# Altium PCB poe.PcbDoc
Units mm, origin at the board's own origin, x right, y up, seen from the top; angles counter-clockwise.
Board outline 35.6 x 44.4 mm, 2 copper layers (Top, Bottom), stack 1.58 mm thick; 47 components, 38 nets, 142 pads, 50 vias.
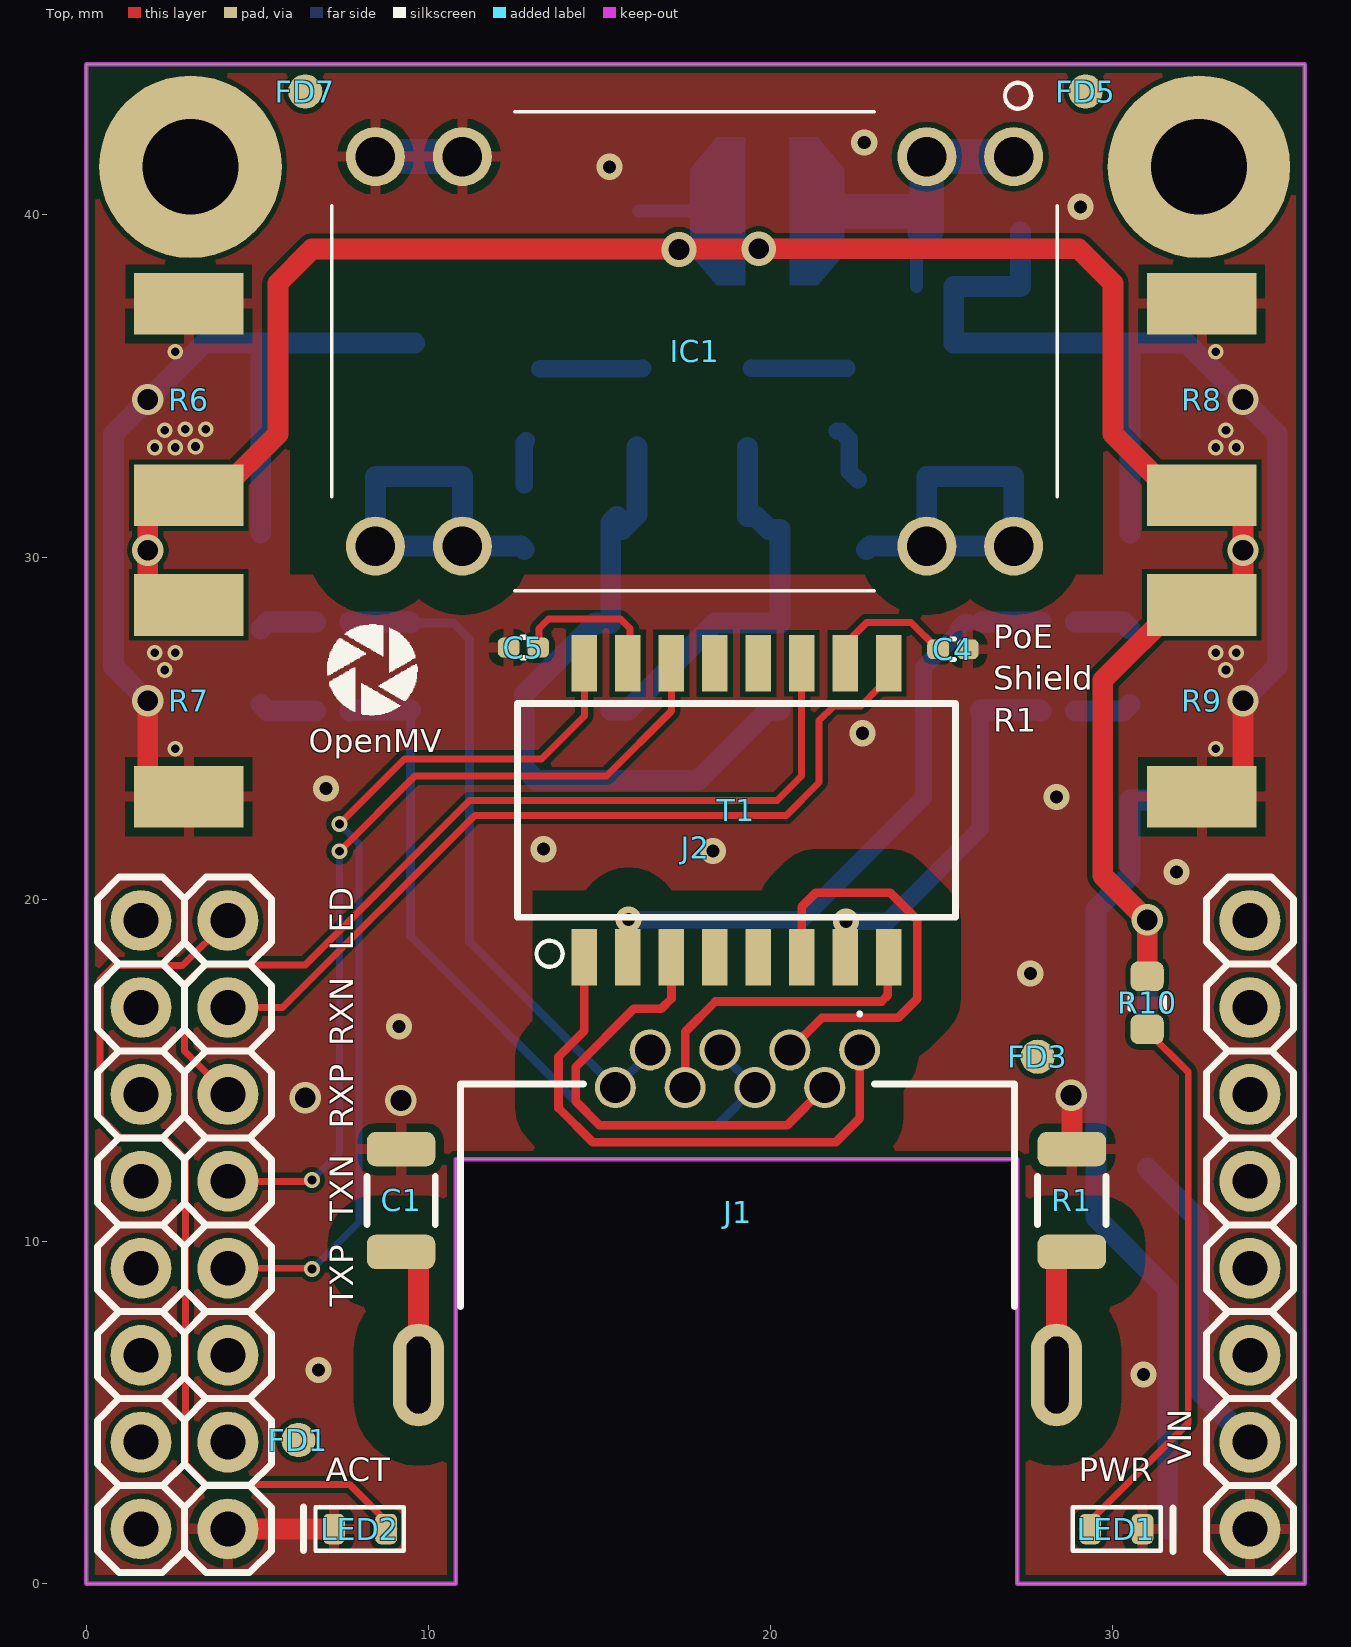
[diagram p0: Top view]
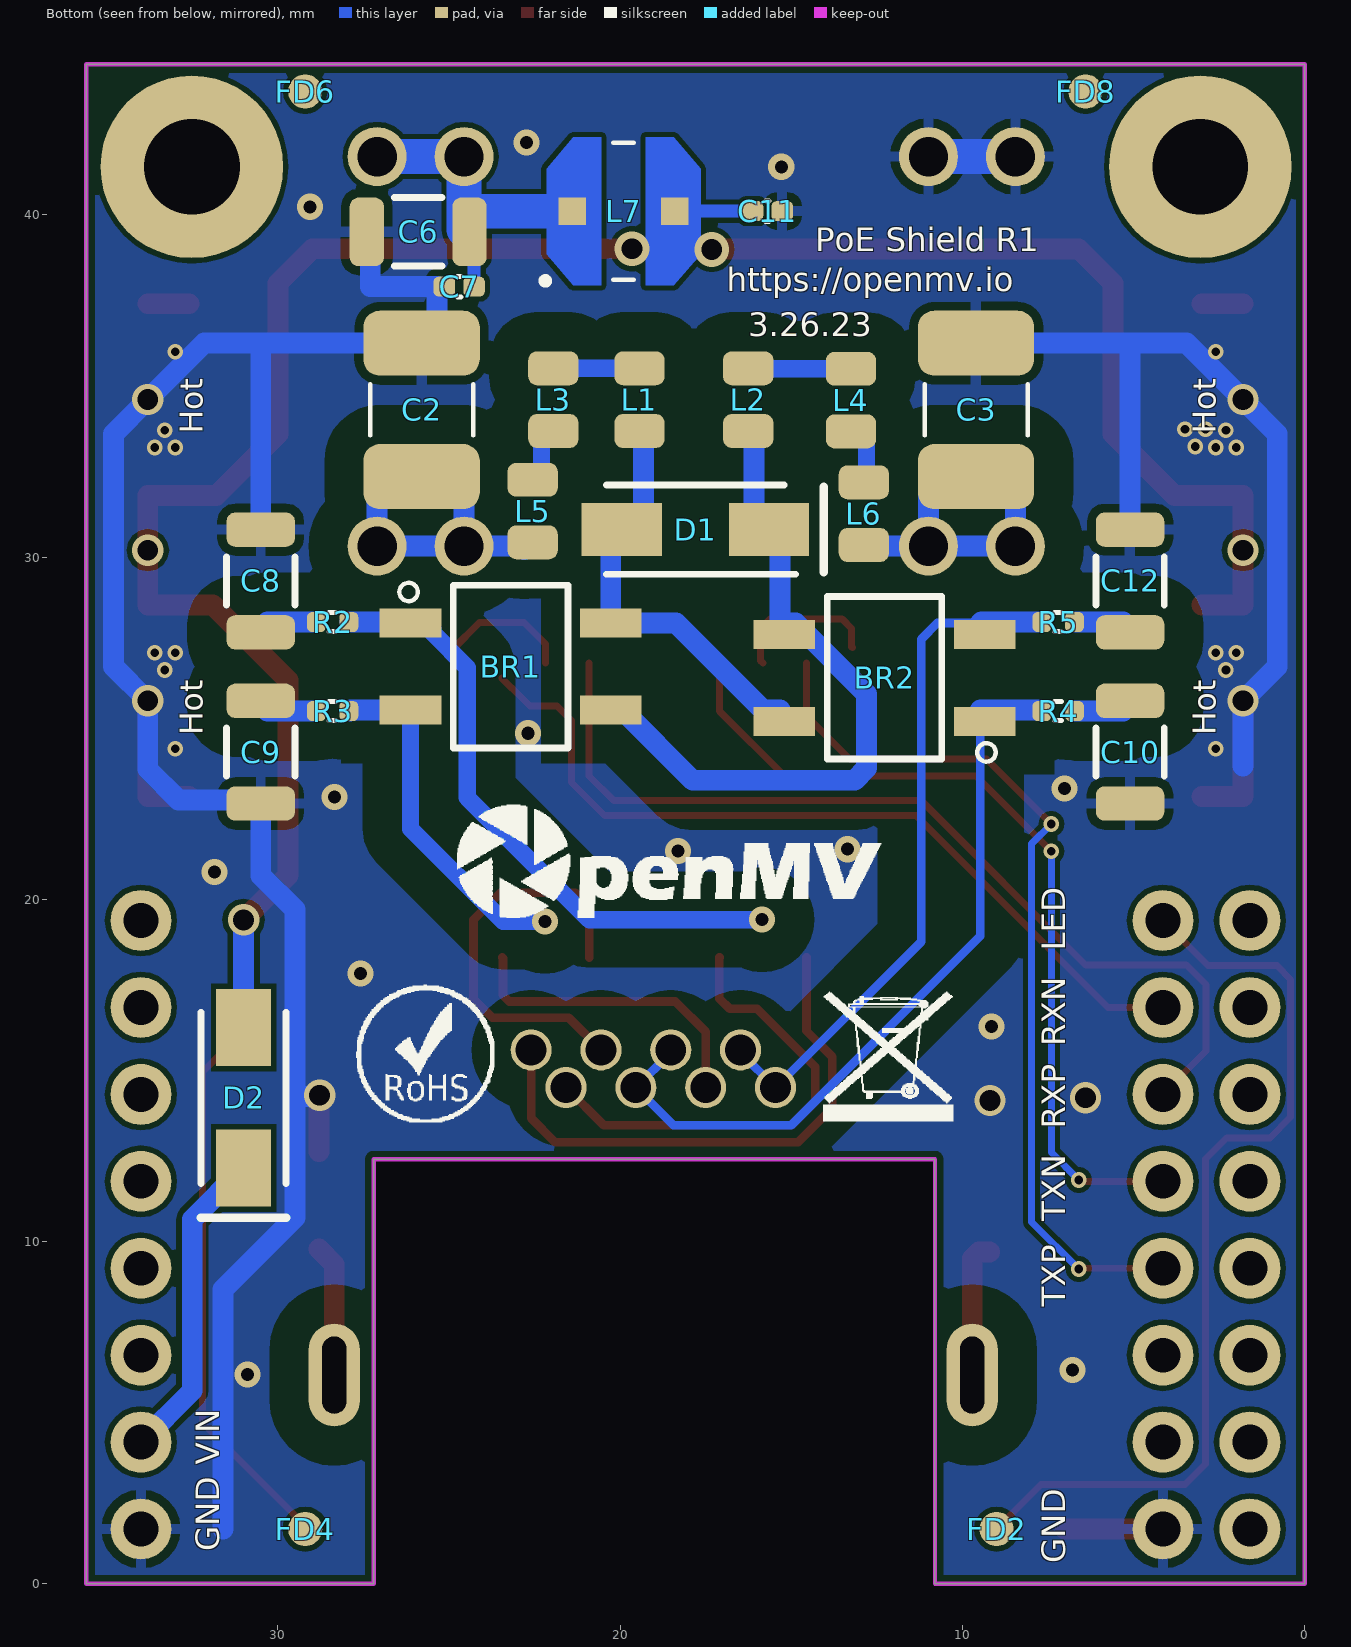
[diagram p1: Bottom view, seen from below]
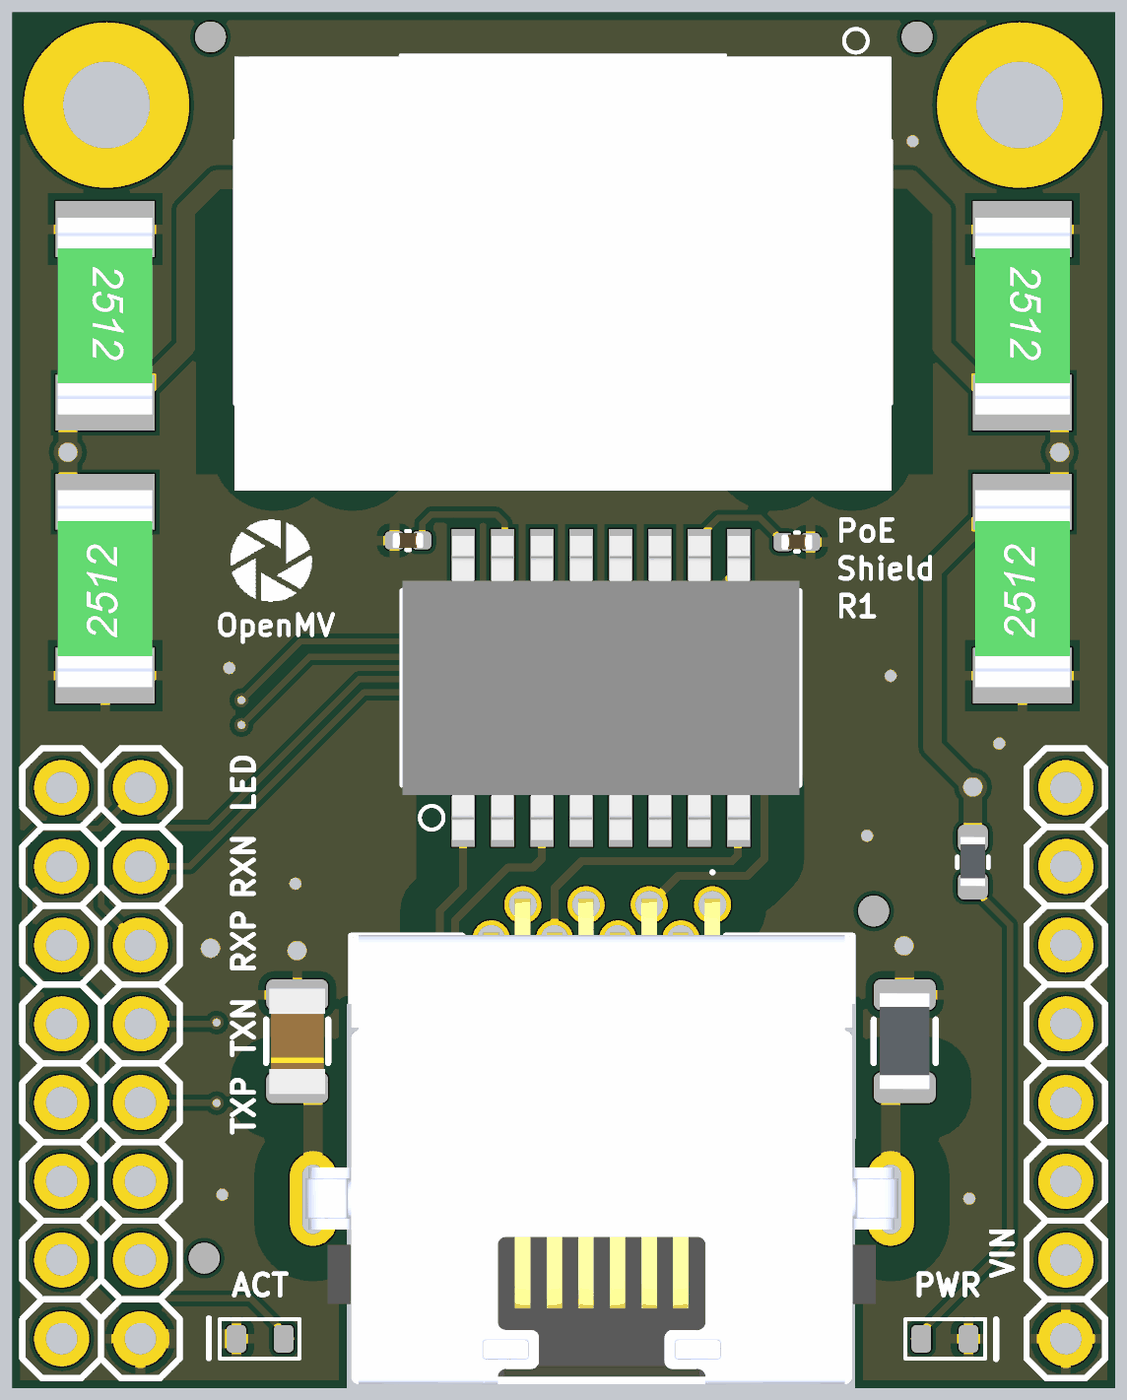
[diagram p2: 3D render of the assembled board from above, using the file's embedded part models]
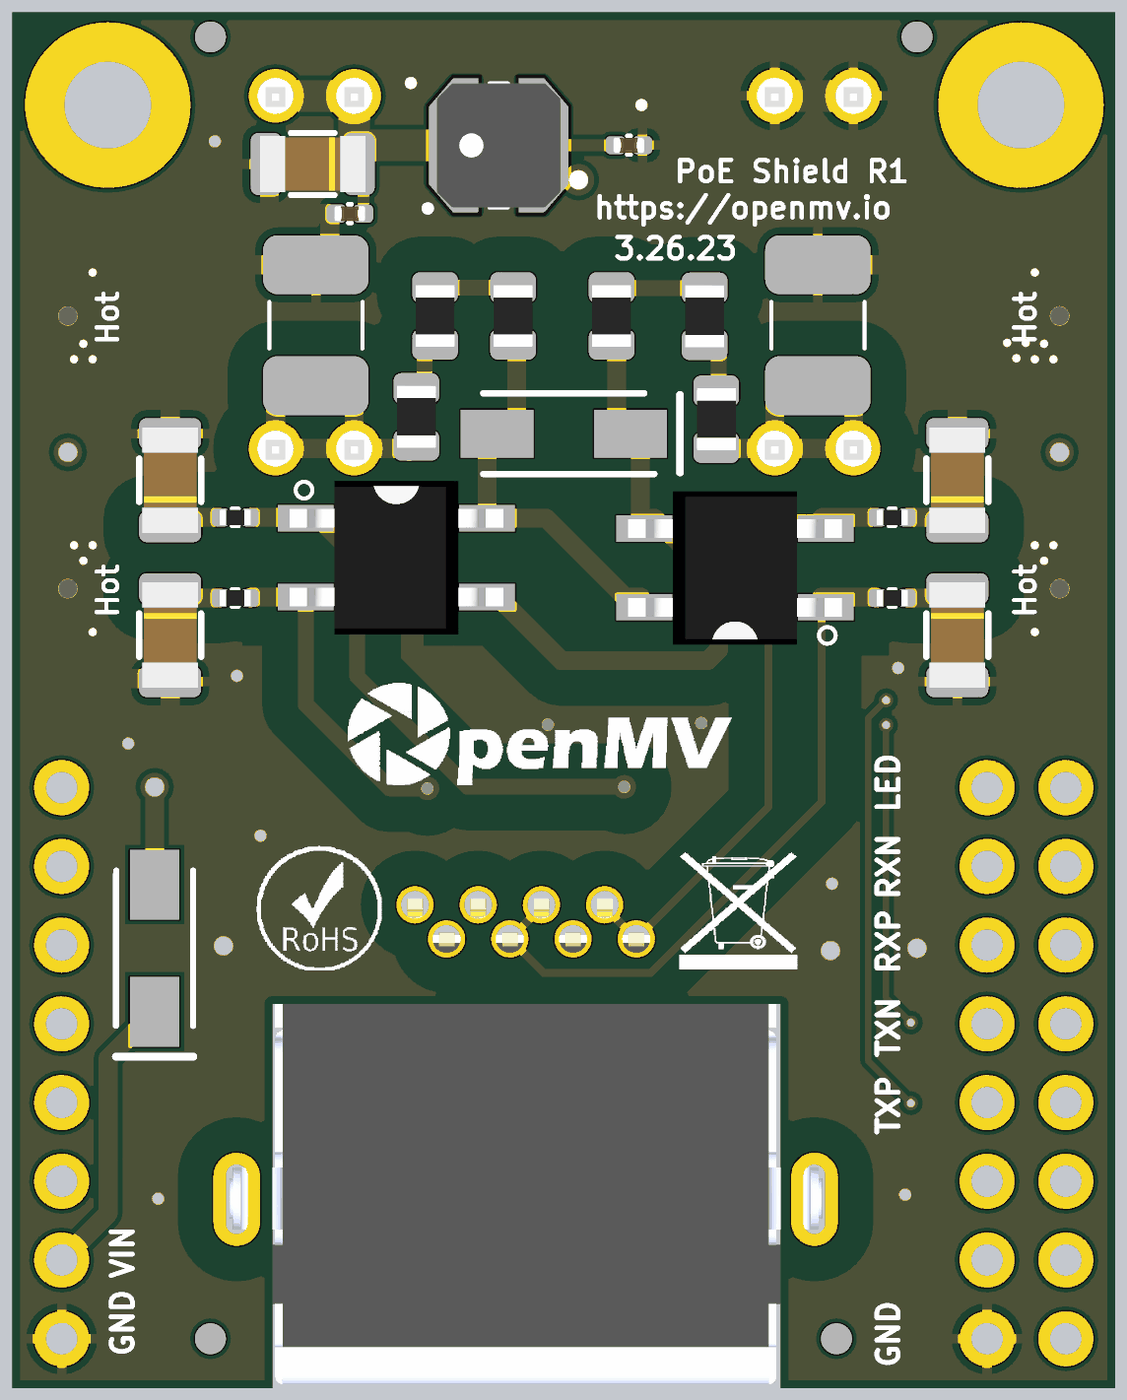
[diagram p3: 3D render of the assembled board from below, using the file's embedded part models]

## Layer stack, top to bottom
Top Solder: solder mask 0.0102, Solder Resist, Dk 3.5
Top: signal copper 0.035
Dielectric 1: dielectric 1.51, FR-4, Dk 4.8
Bottom: signal copper 0.035
Bottom Solder: solder mask 0.0102, Solder Resist, Dk 3.5

## Board outline
-0.001,44.4 -0.001,0 10.799,0 10.799,12.4 27.199,12.4 27.199,0 35.599,0 35.599,44.4

## Design rules (kind name [scope] priority, off if disabled: settings)
BoardOutlineClearance mdCopperDimension [All] p1: gap=0.254 ignorepadtopadclearanceinfootprint=FALSE except(0: Arc-SplitContinuation Track-SplitContinuation SMDPad-SplitContinuation THPad-SplitContinuation Via-SplitContinuation Fill-SplitContinuation Poly-SplitContinuation Region-SplitContinuation Text-SplitContinuation)
Clearance Clearance_1 [InNetClass('iso') vs not InNetClass('iso')  and not OnLayer('Keep-Out Layer')] p1: gap=1.143 ignorepadtopadclearanceinfootprint=FALSE
Clearance Clearance_for_PolygonClass_Isolate_6 [InPolygonClass('Isolate_6') vs IsArc Or IsTrack Or IsPad Or IsVia Or IsFill Or IsRegion Or IsText] p2: gap=0.152 ignorepadtopadclearanceinfootprint=FALSE
Clearance Clearance_for_NetClass_power [InNetClass('power') vs InNetClass('power')] p3: gap=0.127 ignorepadtopadclearanceinfootprint=FALSE
Clearance Clearance_for_NetClass_power_And_iso [InNetClass('power') vs InNetClass('iso')] p4: gap=0.127 ignorepadtopadclearanceinfootprint=FALSE
Clearance Clearance_for_NetClass_power_And_signal [InNetClass('power') vs InNetClass('signal')] p5: gap=0.127 ignorepadtopadclearanceinfootprint=FALSE
Clearance Clearance_for_NetClass_power_And_gnd [InNetClass('power') vs InNetClass('gnd')] p6: gap=0.127 ignorepadtopadclearanceinfootprint=FALSE
Clearance Clearance_for_NetClass_power_And_mdi [InNetClass('power') vs InNetClass('mdi')] p7: gap=0.127 ignorepadtopadclearanceinfootprint=FALSE
Clearance Clearance_for_NetClass_power_And_default [InNetClass('power') vs IsArc Or IsTrack Or IsPad Or IsVia Or IsFill Or IsRegion Or IsText] p8: gap=0.127 ignorepadtopadclearanceinfootprint=FALSE
Clearance Clearance_for_NetClass_iso [InNetClass('iso') vs InNetClass('iso')] p9: gap=0.127 ignorepadtopadclearanceinfootprint=FALSE
Clearance Clearance_for_NetClass_signal [InNetClass('signal') vs InNetClass('signal')] p10: gap=0.127 ignorepadtopadclearanceinfootprint=FALSE
Clearance Clearance_for_NetClass_signal_And_gnd [InNetClass('signal') vs InNetClass('gnd')] p11: gap=0.127 ignorepadtopadclearanceinfootprint=FALSE
Clearance Clearance_for_NetClass_signal_And_mdi [InNetClass('signal') vs InNetClass('mdi')] p12: gap=0.127 ignorepadtopadclearanceinfootprint=FALSE
Clearance Clearance_for_NetClass_signal_And_default [InNetClass('signal') vs IsArc Or IsTrack Or IsPad Or IsVia Or IsFill Or IsRegion Or IsText] p13: gap=0.127 ignorepadtopadclearanceinfootprint=FALSE
Clearance Clearance_for_NetClass_gnd [InNetClass('gnd') vs InNetClass('gnd')] p14: gap=0.127 ignorepadtopadclearanceinfootprint=FALSE
Clearance Clearance_for_NetClass_gnd_And_mdi [InNetClass('gnd') vs InNetClass('mdi')] p15: gap=0.127 ignorepadtopadclearanceinfootprint=FALSE
Clearance Clearance_for_NetClass_gnd_And_default [InNetClass('gnd') vs IsArc Or IsTrack Or IsPad Or IsVia Or IsFill Or IsRegion Or IsText] p16: gap=0.127 ignorepadtopadclearanceinfootprint=FALSE
Clearance Clearance_for_NetClass_mdi [InNetClass('mdi') vs InNetClass('mdi')] p17: gap=0.127 ignorepadtopadclearanceinfootprint=FALSE
Clearance Clearance_for_NetClass_mdi_And_default [InNetClass('mdi') vs IsArc Or IsTrack Or IsPad Or IsVia Or IsFill Or IsRegion Or IsText] p18: gap=0.127 ignorepadtopadclearanceinfootprint=FALSE
Clearance [All] p19: gap=0.127 ignorepadtopadclearanceinfootprint=FALSE
ComponentClearance [All vs not InComponent('J2') and not InComponent('J1')] p1: gap=0.254 collisioncheckmode=3 verticalgap=0.254 showdistances=FALSE
HoleSize HoleSize_For_NetClass_power [InNetClass('power')] p1: absolutevalues=TRUE maxlimit=0.254 minlimit=0.254 maxpercent=80.000 minpercent=20.000
HoleSize HoleSize_For_NetClass_iso [InNetClass('iso')] p2: absolutevalues=TRUE maxlimit=0.254 minlimit=0.254 maxpercent=80.000 minpercent=20.000
HoleSize HoleSize_For_NetClass_signal [InNetClass('signal')] p3: absolutevalues=TRUE maxlimit=0.254 minlimit=0.254 maxpercent=80.000 minpercent=20.000
HoleSize HoleSize_For_NetClass_gnd [InNetClass('gnd')] p4: absolutevalues=TRUE maxlimit=0.254 minlimit=0.254 maxpercent=80.000 minpercent=20.000
HoleSize HoleSize_For_NetClass_mdi [InNetClass('mdi')] p5: absolutevalues=TRUE maxlimit=0.254 minlimit=0.254 maxpercent=80.000 minpercent=20.000
HoleSize [All] p6: absolutevalues=TRUE maxlimit=2540 minlimit=0.254 maxpercent=80.000 minpercent=20.000
HoleToHoleClearance mdDrill [All] p1: gap=0.254 allowstackedmicrovias=TRUE
MinimumSolderMaskSliver [All] p1 off: minsoldermaskwidth=0.254
PasteMaskExpansion Expansion_SMDPaste_OFF [InPadClass('SMDPaste_OFF')] p1: expansion=0
PasteMaskExpansion mlMinCreamFrame [All] p2: expansion=0
PolygonConnect PolygonConnect_For_PolygonThermal_ON_Width120000_Gap100000 [InPolygonClass('PolygonThermal_ON_Width120000_Gap100000') vs Not IsVia] p1: connectstyle=Relief reliefconductorwidth=0.305 reliefentries=4 polygonreliefangle="90 Angle" airgapwidth=0.254
PolygonConnect ThermalVias [IsVia] p2: connectstyle=Direct reliefconductorwidth=0.254 reliefentries=4 polygonreliefangle="90 Angle" airgapwidth=0.254
PolygonConnect [All] p3: connectstyle=Relief reliefconductorwidth=0.254 reliefentries=4 polygonreliefangle="90 Angle" airgapwidth=0.254
RoutingVias [All] p1: holewidth=0.254 width=0.457 viastyle="Through Hole" minholewidth=0.254 minwidth=0.457 maxholewidth=2.54 maxwidth=2.54
SolderMaskExpansion mlMinStopFrame [All] p1: expansion=0.051 istentingtop=FALSE
Width Width_For_NetClass_power [InNetClass('power')] p1: maxlimit=5.08 minlimit=0.127 preferedwidth=0.127 minimp=50.000000 maximp=50.000000 favimp=50.000000
Width Width_For_NetClass_iso [InNetClass('iso')] p2: maxlimit=5.08 minlimit=0.127 preferedwidth=0.127 minimp=50.000000 maximp=50.000000 favimp=50.000000
Width Width_For_NetClass_signal [InNetClass('signal')] p3: maxlimit=5.08 minlimit=0.203 preferedwidth=0.203 minimp=50.000000 maximp=50.000000 favimp=50.000000
Width Width_For_NetClass_gnd [InNetClass('gnd')] p4: maxlimit=5.08 minlimit=0.127 preferedwidth=0.127 minimp=50.000000 maximp=50.000000 favimp=50.000000
Width Width_For_NetClass_mdi [InNetClass('mdi')] p5: maxlimit=5.08 minlimit=0.203 preferedwidth=0.203 minimp=50.000000 maximp=50.000000 favimp=50.000000
Width [All] p6: maxlimit=5.08 minlimit=0.127 preferedwidth=0.127 minimp=50.000000 maximp=50.000000 favimp=50.000000
25 further rules are at their usual default settings.

## Classes and differential pairs
polygon class PolygonThermal_ON_Width120000_Gap100000: Polygon_1_Net_GND Polygon_2_Net_GND
polygon class Isolate_6: Polygon_1_Net_GND Polygon_2_Net_GND
pad class SMDPaste_OFF: FD1-1 FD2-1 FD3-1 FD4-1 FD5-1 FD6-1 FD7-1 FD8-1

## Components (designator, comment, footprint, x,y, rotation, side; value= is the part's Value field where it differs from the comment)
BR1 "MB6S-TP" SOP254P665X270-4N 23.199,26.8 r180 bottom
BR2 "MB6S-TP" SOP254P665X270-4N 12.274,26.47 r0 bottom
C1 "1nF" C1206 9.199,11.2 r90 top
C2 "4.7nF" C1812 25.799,34.3 r90 bottom
C3 "4.7nF" C1812 9.599,34.3 r90 bottom
C4 "0.1uF" C0402 25.323,27.305 r0 top
C5 "0.1uF" C0402 12.775,27.356 r180 top
C6 "100uF" C1206 25.899,39.5 r0 bottom
C7 "10uF" C0402 24.699,37.9 r0 bottom
C8 "1nF" C1206 30.499,29.3 r90 bottom
C9 "1nF" C1206 30.499,24.3 r270 bottom
C10 "1nF" C1206 5.099,24.3 r270 bottom
C11 "10uF" C0402 15.696,40.107 r180 bottom
C12 "1nF" C1206 5.099,29.3 r90 bottom
D1 "SMAJ58A-13-F" DIOM5226X230N 17.799,30.8 r0 bottom
D2 "FM240A" DIOM5025X231N 30.999,14.2 r90 bottom
FD1 "FIDUCIAL1X2" FIDUCIAL-1X2 6.199,4.2 r0 top
FD2 "FIDUCIAL1X2" FIDUCIAL-1X2 8.999,1.6 r180 bottom
FD3 "FIDUCIAL1X2" FIDUCIAL-1X2 27.799,15.4 r0 top
FD4 "FIDUCIAL1X2" FIDUCIAL-1X2 29.199,1.6 r180 bottom
FD5 "FIDUCIAL1X2" FIDUCIAL-1X2 29.199,43.6 r0 top
FD6 "FIDUCIAL1X2" FIDUCIAL-1X2 29.199,43.6 r180 bottom
FD7 "FIDUCIAL1X2" FIDUCIAL-1X2 6.399,43.6 r0 top
FD8 "FIDUCIAL1X2" FIDUCIAL-1X2 6.399,43.6 r180 bottom
IC1 "AG9905LP" AG9905LP 27.099,41.7 r180 top
J1 "GMJXHT-MM-S-88" GMJXHTMMS88 22.599,15.6 r0 top
J2 "Shield Interface" OPENMV5-BOTTOM -0.001,0 r0 top locked
L1 "1k" R0805 19.433,34.598 r90 bottom
L2 "1k" R0805 16.255,34.598 r90 bottom
L3 "1k" R0805 21.949,34.598 r270 bottom
L4 "1k" R0805 13.253,34.586 r270 bottom
L5 "1k" R0805 22.554,31.344 r270 bottom
L6 "1k" R0805 12.877,31.267 r270 bottom
L7 "VLCF4020T-1R8N1R9" VLCF4020T-1R8N1R9 19.899,40.1 r180 bottom
LED1 "LTST-S270KSKT" LTSTS270K 30.099,1.6 r180 top
LED2 "LTST-S270KGKT" LTSTS270K 7.999,1.6 r0 top
R1 "1M" R1206 28.799,11.2 r270 top
R2 "75" R0402 28.399,28.1 r180 bottom
R3 "75" R0402 28.399,25.5 r180 bottom
R4 "75" R0402 7.199,25.5 r0 bottom
R5 "75" R0402 7.199,28.1 r0 bottom
R6 "100" R2512 2.999,34.6 r270 top
R7 "100" R2512 2.999,25.8 r90 top
R8 "100" R2512 32.599,34.6 r270 top
R9 "100" R2512 32.599,25.8 r90 top
R10 "470" R0603 30.999,17 r90 top
T1 "PT61018PEL" SOIC127P930X565-16N 18.999,22.6 r90 top

## Footprints (in the part's own frame and the unit in brackets; to place one, negate y for a bottom-side part, rotate by r counter-clockwise, add the part's x,y. Pads: shape width x height; smd on the part's side, far side on the other; paste and mask are expansions set on the pad)
AG9905LP [mm] "AG9905LP"
  round 1.725 / inner round 0 / far side round 1.725 hole 1.15: 1(0,0) 2(2.54,0) 3(16.11,0) 4(18.65,0) 5(18.65,11.38) 6(16.11,11.38) 7(2.54,11.38) 8(0,11.38)
  silkscreen extent -1.27,-2.16 19.92,12.69, body extent -1.27,-1.27 19.92,12.73, height 8.15
C0402 [mm] "Chip Capacitor, 2-Leads, Body  0402 (in) 1005 (mm), IPC Medium Density"
  rrect52% 0.63x0.58 smd mask+0.05: 1(-0.435,0) 2(0.435,0)
  silkscreen extent -0.05,-0.3 0.05,0.3, body extent -0.5,-0.25 0.5,0.25, height 0.5
C1206 [mm] "C1206"
  rrect50% 1x2 smd: 1(-1.5,0) 2(1.5,0)
  silkscreen extent -0.7,-1 0.7,1, body extent -1.7,-0.9 1.7,0.9, height 1.8
C1812 [mm] "C1812"
  rrect50% 1.9x3.4 smd: 1(-1.95,0) 2(1.95,0)
  silkscreen extent -0.75,-1.51 0.75,1.5, body extent -2.25,-1.5 2.25,1.5, height 2.8
DIOM5025X231N [mm] "DIOM5025X231N"
  rect 2.25x1.6 smd: 1(-2.05,0) 2(2.05,0)
  silkscreen extent -3.5,-1.25 2.5,1.25, body extent -2.25,-1.25 2.25,1.25, height 2
DIOM5226X230N [mm] "DIOM5226X230N"
  rect 2.35x1.55 smd: 1(-2.15,0) 2(2.15,0)
  silkscreen extent -3.75,-1.3 2.6,1.3, body extent -2.25,-1.25 2.25,1.25, height 2.4
FIDUCIAL-1X2 [mm] "FIDUCIAL-1X2"
  rrect100% 1x1 smd paste+0: 1(0,0)
GMJXHTMMS88 [mm] "GMJXHTMMS88"
  round 1.2 / inner round 0 / far side round 1.2 hole 0.9: 1(0,0) 2(-1.02,-1.1) 3(-2.04,0) 4(-3.06,-1.1) 5(-4.08,0) 6(-5.1,-1.1) 7(-6.12,0) 8(-7.14,-1.1)
  oval 1.5x3 hole 0.7 slot 2.25 at 90 deg: MH1(5.751,-9.5) MH2(-12.889,-9.5)
  silkscreen extent -11.66,-7.5 4.52,1.1, body extent -13.14,-15.48 5.99,0.2, height 8.81
LTSTS270K [mil] "LTSTS270K"
  rrect50% 25x35 smd: 1(-30,0) 2(30,0)
  silkscreen extent -65,-25 50,26, body extent -33,-16 33,16, height 31
OPENMV5-BOTTOM [mil] "OPENMV5-BOTTOM"
  round 70 / inner round 0 / far side round 70 hole 40: 1(62.99,762.99) 2(62.99,662.99) 3(62.99,562.99) 4(62.99,462.99) 5(62.99,362.99) 6(62.99,262.99) 7(62.99,162.99) 8(62.99,62.99) 9(1338.58,62.99) 10(1338.58,162.99) 11(1338.58,262.99) 12(1338.58,362.99) 13(1338.58,462.99) 14(1338.58,562.99) 15(1338.58,662.99) 16(1338.58,762.99) 17(162.99,762.99) 18(162.99,662.99) 19(162.99,562.99) 20(162.99,462.99) 21(162.99,362.99) 22(162.99,262.99) 23(162.99,162.99) 24(162.99,62.99)
  round 210 / inner round 0 / far side round 210 hole 110.24: 25(120,1630) 26(1280,1630)
  silkscreen extent 13,13 1389,813
R0402 [mm] "Chip Resistor, 2-Leads, Body  0402 (in) 1005 (mm), IPC Medium Density"
  rrect51% 0.55x0.58 smd mask+0.05: 1(-0.475,0) 2(0.475,0)
  silkscreen extent -0.1,-0.28 0.1,0.28, body extent -0.5,-0.25 0.5,0.25, height 0.34
R0603 [mm]
  rrect51% 0.87x0.97 smd mask+0.05: 1(-0.8,0) 2(0.75,0)
  silkscreen extent -0.2,-0.5 0.15,0.5, body extent -0.8,-0.4 0.8,0.4, height 0.45
R0805 [mm] "Chip Resistor - Body 0805 imperial, 2.0x1.2mm, IPC Medium Density"
  rrect51% 0.99x1.47 smd: 1(-0.915,0) 2(0.915,0)
  body extent -1,-0.63 1,0.63, height 0.58
R1206 [mm] "IPC 7351 1206"
  rrect50% 1x2 smd: 1(-1.5,0) 2(1.5,0)
  silkscreen extent -0.7,-1 0.7,1, body extent -1.55,-0.8 1.55,0.8, height 0.55
R2512 [mm] "R2512"
  rect 1.8x3.2 smd: 1(-2.8,0) 2(2.8,0)
  body extent -3.17,-1.52 3.18,1.53, height 1.51
SOIC127P930X565-16N [mm] "SOIC127P930X565-16N"
  rect 1.65x0.75 smd: 1(-4.3,4.445) 2(-4.3,3.175) 3(-4.3,1.905) 4(-4.3,0.635) 5(-4.3,-0.635) 6(-4.3,-1.905) 7(-4.3,-3.175) 8(-4.3,-4.445) 9(4.3,-4.445) 10(4.3,-3.175) 11(4.3,-1.905) 12(4.3,-0.635) 13(4.3,0.635) 14(4.3,1.905) 15(4.3,3.175) 16(4.3,4.445)
  silkscreen extent -4.57,-6.4 3.12,6.4, body extent -4.91,-6.4 4.91,6.4, height 5.64
SOP254P665X270-4N [mm] "SOP254P665X270-4N"
  rect 1.8x0.85 smd: 1(-2.925,1.27) 2(-2.925,-1.27) 3(2.925,-1.27) 4(2.925,1.27)
  silkscreen extent -3.25,-2.37 1.67,2.45, body extent -3.45,-2.47 3.45,2.48, height 3.14
VLCF4020T-1R8N1R9 [mm]
  rect 0.8x0.8 smd paste-1 mask+0: 1(-1.5,0) 2(1.5,0)
  Top region: -1.471,2.159 -0.65,2.159 -0.65,-2.159 -1.471,-2.159 -2.25,-1.25 -2.25,1.25
  Top region: 1.471,2.159 2.25,1.25 2.25,-1.25 1.471,-2.159 0.65,-2.159 0.65,2.159
  silkscreen extent -2.39,-2.13 0.3,2, body extent -2,-2 2,2, height 2.01

## Part data
BR1 BR2: "MICRO COMMERCIAL COMPONENTS - MB6S-TP - BRIDGE RECTIFIER, 500mA, 600V   Source:  Datasheet", MANUFACTURER_NAME=MCC, DeviceSetName=MB6S-TP, GateName_1=G$1, HEIGHT=2.7mm, LibraryName=MB6S-TP, MANUFACTURER_PART_NUMBER=MB6S-TP, MOUSER_PART_NUMBER=833-MB6S-TP, MOUSER_PRICE-STOCK=https://www.mouser.co.uk/ProductDetail/Micro-Commercial-Components-MCC/MB6S-TP?qs=O2qRfqcg9D9hSJLw3ZCqJw%3D%3D, MPN=MB6S-TP, Part Number=MB6S-TP, SymbolName_1=MB6S-TP
C1 C8 C9 C10 C12: library part C-EUC1206, "CAPACITOR, European symbol", MPN=1206B102K252CT, DeviceName=C1206, DeviceSetName=C-EU, GateName_1=G$1, LibraryName=rcl, Part Number=1206B102K252CT, POPULARITY=54, SPICEPREFIX=C, SymbolName_1=C-EU
C2 C3: library part C-EUC1812, "CAPACITOR, European symbol", MPN=202S43W472KV4E, DeviceName=C1812, DeviceSetName=C-EU, GateName_1=G$1, LibraryName=rcl, Part Number=202S43W472KV4E, POPULARITY=3, SPICEPREFIX=C, SymbolName_1=C-EU
C4 C5: library part C-EUC0201, "CAPACITOR, European symbol", MPN=GRM155R71H104KE14D, DeviceName=C0201, DeviceSetName=C-EU, GateName_1=G$1, LibraryName=rcl, Part Number=GRM155R71H104KE14D, POPULARITY=0, SPICEPREFIX=C, SymbolName_1=C-EU
C6: library part C-EUC1206, "CAPACITOR, European symbol", MPN=CL31A107MQHNNWE, DeviceName=C1206, DeviceSetName=C-EU, GateName_1=G$1, LibraryName=rcl, Part Number=CL31A107MQHNNWE, POPULARITY=54, SPICEPREFIX=C, SymbolName_1=C-EU
C7 C11: library part C-EUC0402, "CAPACITOR, European symbol", MPN=GRM155R60J106ME05D, DeviceName=C0402, DeviceSetName=C-EU, GateName_1=G$1, LibraryName=rcl, Part Number=GRM155R60J106ME05D, POPULARITY=18, SPICEPREFIX=C, SymbolName_1=C-EU
D1: "Diodes Inc SMAJ58A-13-F, Uni-Directional TVS Diode, 400W, 2-Pin DO-214AC   Source:  Datasheet", MANUFACTURER_NAME="Diodes Inc.", MPN=SMAJ58A/TR13, DeviceSetName=SMAJ58A-13-F, GateName_1=G$1, HEIGHT=2.3mm, LibraryName=SMAJ58A-13-F, MANUFACTURER_PART_NUMBER=SMAJ58A-13-F, MOUSER_PART_NUMBER=621-SMAJ58A-13-F, MOUSER_PRICE-STOCK=https://www.mouser.co.uk/ProductDetail/Diodes-Incorporated/SMAJ58A-13-F?qs=gaDBXWSqsDABoBswSRRvMQ%3D%3D, Part Number=SMAJ58A/TR13, SymbolName_1=SMAJ58A-13-F
D2: "Diodes - General Purpose, Power, Switching GP Si Rectifier SMB,2A,40V   Source:  Datasheet", MANUFACTURER_NAME=Rectron, DeviceSetName=FM240A, GateName_1=G$1, HEIGHT=2.31mm, LibraryName=FM240A, MANUFACTURER_PART_NUMBER=FM240A, MOUSER_PART_NUMBER=583-FM240A, MOUSER_PRICE-STOCK=https://www.mouser.co.uk/ProductDetail/Rectron/FM240A?qs=7pEAo90IqNG7sknZwmLYhQ%3D%3D, MPN=FM240A, Part Number=FM240A, SymbolName_1=FM240A
FD1 FD2 FD3 FD4 FD5 FD6 FD7 FD8: "Fiducial Alignment Points    Point-of-reference for pick-and-place machines and other optical instruments.", DeviceName=1X2, DeviceSetName=FIDUCIAL, GateName_1=G$1, LibraryName=SparkFun-Aesthetics, SymbolName_1=FIDUCIAL
IC1: "Power Management Modules IEEE802.3af PD module. 5V 7W, low profile   Source:  Datasheet", MANUFACTURER_NAME=Silvertel, MANUFACTURER_PART_NUMBER=Ag9905LP, DeviceSetName=AG9905LP, GateName_1=G$1, HEIGHT=8.5mm, LibraryName=Ag9905LP, MOUSER_PART_NUMBER=480-AG9905LP, MOUSER_PRICE-STOCK=https://www.mouser.co.uk/ProductDetail/Silvertel/Ag9905LP?qs=OlC7AqGiEDm9ZoM6zJQCoQ%3D%3D, MPN=Ag9905LP, Part Number=Ag9905LP, SymbolName_1=AG9905LP
J1: "MODJACK MIDMOUNT 8P8C SHIELD RoHS COMPLIANT   Source:  Datasheet", MANUFACTURER_NAME=Kycon, DeviceSetName=GMJXHT-MM-S-88, GateName_1=G$1, HEIGHT=10.1mm, LibraryName=GMJXHT-MM-S-88, MANUFACTURER_PART_NUMBER=GMJXHT-MM-S-88, MOUSER_PART_NUMBER=806-GMJXHT-MM-S-88, MOUSER_PRICE-STOCK=https://www.mouser.co.uk/ProductDetail/Kycon/GMJXHT-MM-S-88?qs=2OnyuXx6vpiODS6CjVUhnA%3D%3D, MPN=GMJXHT-MM-S-88, Part Number=GMJXHT-MM-S-88, SymbolName_1=GMJXHT-MM-S-88
J2: library part OPENMV5-BOTTOM, MPN=DNP, DeviceSetName=OPENMV5-BOTTOM, GateName_1=G$1, LibraryName=openmv5, Part Number=DNP, SymbolName_1=OPENMV5
L1 L2 L3 L4 L5 L6: library part INDUCTOR-0402-3.9NH, "Inductors    Resist changes in electrical current. Basically a coil of wire.   SparkFun Products:  SparkFun Load Cell Amplifier - HX711  IOIO-OTG - V2.2", MPN=2508051027Y1, DeviceName=-0402-3.9NH, DeviceSetName=INDUCTOR, GateName_1=G$1, LibraryName=SparkFun-Coils, Part Number=2508051027Y1, PROD_ID=NDUC-13457, SymbolName_1=INDUCTOR
L7: library part NR6045T1R8N, "Power Inductors - SMD 1.8uH 1.9A 4x4x2.0mm", MANUFACTURER_NAME=TDK, GateName_1=G$1, MANUFACTURER_PART_NUMBER=VLCF4020T-1R8N1R9, MPN=VLCF4020T-1R8N1R9, Part Number=VLCF4020T-1R8N1R9
LED1: "LED,0603,Side View,Yellow,60mcd Lite-On LTST-S270KSKT Yellow LED, 589 nm 1608 (0603) Side View, Rectangle Lens SMD package   Source:  Datasheet", MANUFACTURER_NAME=Lite-On, DeviceSetName=LTST-S270KSKT, GateName_1=G$1, HEIGHT=1mm, LibraryName=LTST-S270K, MANUFACTURER_PART_NUMBER=LTST-S270KSKT, MOUSER_PART_NUMBER=859-LTST-S270KSKT, MOUSER_PRICE-STOCK=https://www.mouser.com/ProductDetail/Lite-On/LTST-S270KSKT?qs=1%252Ba%252Bh4jXs3oCxYgJuiLmrQ%3D%3D, MPN=LTST-S270KSKT, Part Number=LTST-S270KSKT, SymbolName_1=LTST-S270K
LED2: "LED,0603,Side View,Green,35mcd Lite-On LTST-S270KGKT Green LED,571 nm 1608 (0603) Side View, Rectangle Lens SMD package   Source:  Datasheet", MANUFACTURER_NAME=Lite-On, DeviceSetName=LTST-S270KGKT, GateName_1=G$1, HEIGHT=1mm, LibraryName=LTST-S270K, MANUFACTURER_PART_NUMBER=LTST-S270KGKT, MOUSER_PART_NUMBER=859-LTST-S270KGKT, MOUSER_PRICE-STOCK=https://www.mouser.com/ProductDetail/Lite-On/LTST-S270KGKT?qs=oL5uk4n%2FG821%2FMiCU6RADg%3D%3D, MPN=LTST-S270KGKT, Part Number=LTST-S270KGKT, SymbolName_1=LTST-S270K
R1: library part R-US_R1206, "RESISTOR, American symbol", MPN=RMCF1206FT1M00, DeviceName=R1206, DeviceSetName=R-US_, GateName_1=G$1, LibraryName=rcl, Part Number=RMCF1206FT1M00, POPULARITY=19, SPICEPREFIX=R, SymbolName_1=R-US
R2 R3 R4 R5: library part R-US_R0402, "RESISTOR, American symbol", MPN=CR0402-FX-75R0GLF, DeviceName=R0402, DeviceSetName=R-US_, GateName_1=G$1, LibraryName=rcl, Part Number=CR0402-FX-75R0GLF, POPULARITY=34, SPICEPREFIX=R, SymbolName_1=R-US
R6 R7 R8 R9: library part R-US_R2512, "RESISTOR, American symbol", MPN=RC2512JK-07100RL, DeviceName=R2512, DeviceSetName=R-US_, GateName_1=G$1, LibraryName=rcl, Part Number=RC2512JK-07100RL, POPULARITY=0, SPICEPREFIX=R, SymbolName_1=R-US
R10: library part R-US_R0603, "RESISTOR, American symbol", MPN=CR0603-FX-4700ELF, DeviceName=R0603, DeviceSetName=R-US_, GateName_1=G$1, LibraryName=rcl, Part Number=CR0603-FX-4700ELF, POPULARITY=77, SPICEPREFIX=R, SymbolName_1=R-US
T1: "BOURNS - PT61018PEL - TRANSFORMER, LAN, 1CT:1CT, 350UH, SMD   Source:  Datasheet", MANUFACTURER_NAME=Bourns, DeviceSetName=PT61018PEL, GateName_1=G$1, HEIGHT=5.65mm, LibraryName=PT61018PEL, MANUFACTURER_PART_NUMBER=PT61018PEL, MOUSER_PART_NUMBER=652-PT61018PEL, MOUSER_PRICE-STOCK=https://www.mouser.co.uk/ProductDetail/Bourns/PT61018PEL?qs=G1LhLIAbs1x4VqIQtFg%252BEw%3D%3D, MPN=PT61018PEL, Part Number=PT61018PEL, SymbolName_1=PT61018PEL

## Via types
v1: diameter 0.457, hole 0.254, Top to Bottom, tented both sides, 23 vias
v2: diameter 0.762, hole 0.381, Top to Bottom, tented both sides, 15 vias
v3: diameter 0.914, hole 0.61, Top to Bottom, tented both sides, 10 vias
v4: diameter 1.016, hole 0.61, Top to Bottom, tented both sides, 2 vias

## Nets (pads, with @x,y where several pads share a name; then routed paths per layer and width w, separated by ;. In a path a pad name is that pad's centre, name@x,y a point inside that pad or via, vN(x,y) a via of type N, cw(c..) or ccw(c..) an arc to the next point about the centre after c; other vN are vias at no path point)
GND: C1.2 C2.2 C3.2 C4.2 C5.2 C6.2 C7.2 C8.2 C9.2 C10.2 C11.2 C12.2 IC1.3 IC1.4 J2.9 J2.24 LED1.1 LED2.1 R1.1 R6.1 R7.1 R8.1 R9.1 | length 101.5
  Top w0.61: v3(1.799,25.8) 1.799,23 R7.1 ; R6.1@1.799,37.4 R6.1 ; J2.24 LED2.1@6.999,1.6 ; v3(28.777,14.275) 28.799,14.253 R1.1@28.799,12.622 ; R9.1 33.799,23 v3(33.799,25.8) ; R8.1 R8.1@33.799,37.4
  Bottom w0.61: 1.799,23.9 v3(1.799,25.8) 0.799,26.8 0.799,33.6 v3(1.799,34.6) 3.449,36.25 5.099,36.25 ; C12.2@5.099,30.7 5.099,36.25 ; C3.2 5.099,36.25 ; C6.2@27.299,39.5 27.299,37.9 25.349,37.9 25.349,36.25 C2.2 30.499,36.25 ; v3(28.777,14.275) 28.814,14.238 29.461,14.238 29.499,14.2 ; C8.2@30.499,30.7 30.499,36.25 ; 31.599,1.6 31.599,8.6 29.499,10.7 29.499,14.2 ; 29.499,14.2 29.499,19.7 30.499,20.7 30.499,22.9 32.899,22.9 33.799,23.8 v3(33.799,25.8) 34.799,26.8 34.799,33.6 v3(33.799,34.6) 32.149,36.25 30.499,36.25
  Bottom w1.016: IC1.4 IC1.3
  other v1: 2.599,24.4 32.999,24.4 2.299,26.7 33.299,26.7 1.999,27.2 2.599,27.2 32.999,27.2 33.599,27.2 1.999,33.2 2.599,33.2 32.999,33.2 33.599,33.2 3.195,33.231 2.299,33.7 33.299,33.7 2.895,33.731 3.495,33.731 2.599,36 32.999,36
  other v2: 30.886,6.121 6.781,6.248 9.143,16.281 27.584,17.831 31.851,20.803 18.313,21.412 13.36,21.463 28.346,22.987 7.01,23.241 22.684,24.851 29.057,40.234 15.29,41.402 22.732,42.113
  other v3: 9.194,14.122 6.399,14.2
MDI_LED: J2.17 LED2.2 | length 27.3
  Top w0.203: J2.17 2.819,18.059 0.812,18.059 0.406,17.653 0.406,13.64 1.015,13.03 2.285,13.03 2.899,12.416 2.899,3.5 3.499,2.9 7.699,2.9 LED2.2@8.999,1.6
MDI_RX_CT: C4.1 T1.10 | length 3.9
  Top w0.203: T1.10 22.174,27.458 22.804,28.089 24.104,28.089 C4.1
MDI_RX_N: J2.18 T1.9 | length 24.4
  Top w0.203: J2.18 5.739,16.84 11.353,22.454 20.453,22.454 21.415,23.415 21.415,25.226 21.843,25.654 22.631,25.654 23.154,26.176 23.171,26.176 23.444,26.45 T1.9@23.444,26.467
MDI_RX_P: J2.19 T1.11 | length 27.6
  Top w0.203: J2.19 2.876,15.563 2.876,17.508 3.454,18.085 6.4,18.085 11.201,22.885 20.185,22.885 20.904,23.605 T1.11
MDI_TX_CT: C5.1 T1.15 | length 4.5
  Top w0.203: C5.1 13.233,27.378 13.233,27.915 13.509,28.191 15.613,28.191 15.894,27.911 15.894,26.97 T1.15@15.824,26.9
MDI_TX_N: J2.20 T1.14 | length 25.2
  Top w0.203: J2.20 6.559,11.76 v1(6.599,11.8) ; v1(7.399,21.4) 9.599,23.6 15.199,23.6 17.094,25.495 T1.14@17.094,26.9
  Bottom w0.203: v1(6.599,11.8) 7.399,12.6 v1(7.399,21.4)
MDI_TX_P: J2.21 T1.16 | length 26.3
  Top w0.203: J2.21 6.579,9.22 v1(6.599,9.2) ; v1(7.399,22.2) 9.299,24.1 13.299,24.1 14.554,25.355 T1.16@14.554,26.9
  Bottom w0.203: v1(6.599,9.2) 7.976,10.576 7.976,21.624 v1(7.399,22.2)
NC1: T1.4
NC2: T1.5
NC3: T1.12
NC4: T1.13
POE_VIN_INT_N: C2.1 IC1.7 IC1.8 L5.2 | length 10.9
  Bottom w0.61: L5.2@22.799,30.22 22.899,30.32 IC1.7 ; IC1.7 24.559,32.35 C2.1 27.099,32.35 IC1.8 IC1.7
POE_VIN_INT_P: C3.1 IC1.5 IC1.6 L6.2 | length 11
  Bottom w0.61: L6.2@12.799,30.22 12.699,30.32 IC1.6 ; IC1.6 10.989,32.35 C3.1 8.449,32.35 IC1.5 IC1.6
POE_VIN_N: BR1.4 BR2.4 D1.2 L1.1 | length 11.9
  Bottom w0.61: BR2.4@15.324,25.53 15.829,25.53 18.369,28.07 BR1.4 20.274,30.8 D1.2 19.565,31.185 19.319,31.185 L1.1@19.319,33.2
POE_VIN_N0: L1.2 L3.1 | length 2.8
  Bottom w0.508: L1.2 L3.1@22.228,35.513
POE_VIN_N1: L3.2 L5.1 | length 1.7
  Bottom w0.508: L3.2 22.055,33.683 22.296,33.442 22.296,32.5 22.537,32.259 L5.1
POE_VIN_P: BR1.3 BR2.3 D1.1 L2.1 | length 19.8
  Bottom w0.61: D1.1@15.509,31.185 15.324,31 15.324,28.07 14.869,28.07 14.631,27.832 12.798,25.999 12.798,23.833 13.156,23.476 17.876,23.476 19.929,25.53 BR1.3 ; D1.1 16.09,31.241 L2.1@16.09,33.213
POE_VIN_P0: L2.2 L4.1 | length 3
  Bottom w0.508: L4.1 16.244,35.501 L2.2
POE_VIN_P1: L4.2 L6.1 | length 1.3
  Bottom w0.508: L6.1@12.799,32.106 12.799,33.344 L4.2@12.859,33.403
RX_N: J1.6 T1.8 | length 9.1
  Top w0.254: J1.6 17.499,16.128 18.385,17.015 23.237,17.015 23.418,17.196 23.418,18.274 T1.8
RX_P: J1.3 T1.6 | length 12
  Top w0.254: J1.3 21.498,16.54 23.727,16.54 24.282,17.094 24.282,19.402 23.494,20.189 21.311,20.189 20.904,19.782 T1.6
SHIELD_GND: J1.MH1 R1.2 | length 3.9
  Top w0.61: J1.MH1 28.35,9.329 R1.2@28.799,9.778
SHIELD_GND2: C1.1 J1.MH2 | length 4
  Top w0.61: C1.1 9.515,9.7 9.71,9.505 J1.MH2
TX_N: J1.2 T1.3 | length 13.9
  Top w0.254: T1.3 17.099,18.295 17.099,17.1 16.799,16.8 15.999,16.8 14.299,15.1 14.299,14.1 14.999,13.4 20.479,13.4 J1.2
TX_P: J1.1 T1.1 | length 16.2
  Top w0.254: T1.1 14.554,16.155 13.799,15.4 13.799,13.9 14.799,12.9 21.899,12.9 22.599,13.6 J1.1
VA1: BR1.1 R2.2 T1.2 | length 17.6
  Bottom w0.508: v2(15.849,19.406) 20.895,19.406 24.462,22.973 24.462,26.77 25.478,27.786 25.478,27.899 25.66,28.08 BR1.1@25.772,28.08
  Bottom w0.61: BR1.1@26.154,28.1 R2.2@27.899,28.1
VA1_ISO: C8.1 R2.1 | length 1.7
  Bottom w0.61: R2.1@28.899,28.1 30.299,28.1 C8.1@30.499,27.9
VA2: BR1.2 R3.2 T1.7 | length 10.3
  Bottom w0.508: v2(22.199,19.355) 23.418,19.355 26.124,22.061 BR1.2@26.124,25.53
  Bottom w0.61: BR1.2 27.869,25.53 R3.2@27.899,25.5
VA2_ISO: C9.1 R3.1 | length 1.7
  Bottom w0.61: R3.1@28.899,25.5 30.299,25.5 C9.1@30.499,25.7
VB1: BR2.1 J1.4 J1.5 R4.2 | length 22.7
  Bottom w0.254: BR2.1@9.474,25.53 9.474,18.925 14.999,13.4 18.439,13.4 J1.4 18.519,15.52 J1.5
  Bottom w0.61: R4.2@7.699,25.5 7.729,25.53 BR2.1@9.474,25.53
VB1_ISO: C10.1 R4.1 | length 1.7
  Bottom w0.61: C10.1@5.099,25.7 5.299,25.5 R4.1@6.699,25.5
VB2: BR2.2 J1.7 J1.8 R5.2 | length 20.1
  Bottom w0.254: BR2.2@9.474,28.07 10.729,28.07 11.199,27.6 11.199,18.76 J1.8 16.479,15.52 J1.7
  Bottom w0.61: R5.2@7.699,28.1 9.444,28.1 BR2.2@9.474,28.07
VB2_ISO: C12.1 R5.1 | length 1.7
  Bottom w0.61: C12.1@5.099,27.9 5.299,28.1 R5.1@6.699,28.1
VDC: C6.1 C7.1 IC1.1 IC1.2 L7.1 | length 9.6
  Bottom w0.381: C7.1 24.264,39.365 C6.1
  Bottom w1.016: L7.1 24.339,40.1 C6.1@24.485,39.954 ; C6.1@24.499,39.5 24.559,39.56 IC1.2 IC1.1
VIN: C11.1 D2.2 L7.2 R6.2 R7.2 R8.2 R9.2 R10.2 | length 72.6
  Top w0.61: R7.2 1.799,28.6 v3(1.799,30.2) 1.799,31.8 3.799,31.8 5.599,33.6 5.599,38 6.599,39 17.311,39 v4(17.322,38.989) 17.333,39 19.645,39 v4(19.652,39.007) 28.992,39.007 29.999,38 29.999,33.6 31.799,31.8 33.799,31.8 v3(33.799,30.2) 33.799,28.6 31.899,28.6 29.699,26.4 29.699,20.7 v3(30.999,19.4) R10.2@30.999,17.85
  Bottom w0.381: C11.1 18.392,40.107 L7.2
  Bottom w0.61: v4(17.322,38.989) v4@17.285,38.953 ; v4@17.549,39 19.645,39 v4(19.652,39.007) ; D2.2 v3(30.999,19.4) ; v4@17.285,38.953 17.327,38.911 17.244,38.911 v4@17.285,38.953
VIN_INT: D2.1 J2.10 | length 9.3
  Bottom w0.61: D2.1 32.499,10.65 32.499,5.64 J2.10
VIN_LED: LED1.2 R10.1 | length 16.3
  Top w0.203: LED1.2@29.099,1.6 32.199,4.7 32.199,14.95 R10.1@30.999,16.15
pads on no net: FD1.1 FD2.1 FD3.1 FD4.1 FD5.1 FD6.1 FD7.1 FD8.1 J2.1 J2.2 J2.3 J2.4 J2.5 J2.6 J2.7 J2.8 J2.11 J2.12 J2.13 J2.14 J2.15 J2.16 J2.22 J2.23 J2.25 J2.26

## Polygon pours and split planes (outlines as drawn)
GND on Top "Polygon_2_Net_GND" (solid, remove dead copper, pour order 1): -0.053,-0.052 35.652,-0.052 35.652,44.452 -0.053,44.452
GND on Bottom "Polygon_1_Net_GND" (solid, remove dead copper, pour order 0): 0.047,0.047 35.552,0.047 35.552,44.352 0.047,44.352

## Keep-outs
Keep-Out Layer:
  the board outline again, w0.127

## Other copper
Top:
  pour cut-out: 5.943,38.735 5.943,29.489 29.717,29.489 29.717,38.583

## Silkscreen, mask and mechanical layers (free items; w line width, h text height)
Top Overlay:
  drawing of 262 lines, arcs and shapes, not listed
  text "PoE" at 26.499,27.339 h0.69
  text "Shield" at 26.499,26.119 h0.69
  text "R1" at 26.499,24.9 h0.69
  text "OpenMV" at 6.499,24.3 h0.67
  text "LED" at 7.799,18.5 h0.69 r90
  text "RXN" at 7.799,15.7 h0.69 r90
  text "RXP" at 7.799,13.3 h0.69 r90
  text "TXN" at 7.799,10.6 h0.69 r90
  text "TXP" at 7.799,8.1 h0.69 r90
  text "VIN" at 32.29,3.473 h0.69 r90
  text "ACT" at 6.999,3 h0.69
  text "PWR" at 28.999,3 h0.69
Bottom Overlay:
  drawing of 1934 lines, arcs and shapes, not listed
  text "PoE Shield R1" at 14.299,38.938 h0.69
  text "https://openmv.io" at 16.89,37.77 h0.69
  text "3.26.23" at 16.255,36.449 h0.69
  text "Hot" at 2.599,33.6 h0.67 r270
  text "Hot" at 32.199,33.6 h0.67 r270
  text "Hot" at 2.599,24.8 h0.67 r270
  text "Hot" at 32.199,24.8 h0.67 r270
  text "LED" at 6.999,18.5 h0.69 r270
  text "RXN" at 6.999,15.7 h0.69 r270
  text "RXP" at 6.999,13.3 h0.69 r270
  text "TXN" at 6.999,10.6 h0.69 r270
  text "TXP" at 6.999,8.1 h0.69 r270
  text "VIN" at 31.708,3.473 h0.69 r270
  text "GND" at 31.708,0.958 h0.69 r270
  text "GND" at 6.999,0.6 h0.69 r270